# Altium PCB USBASP PCB.PcbDoc
Units mm, origin at the board's own origin, x right, y up, seen from the top; angles counter-clockwise.
Board outline 41.91 x 63.37 mm, 2 copper layers (Top Layer, Bottom Layer); 24 components, 23 nets, 89 pads, 20 vias.
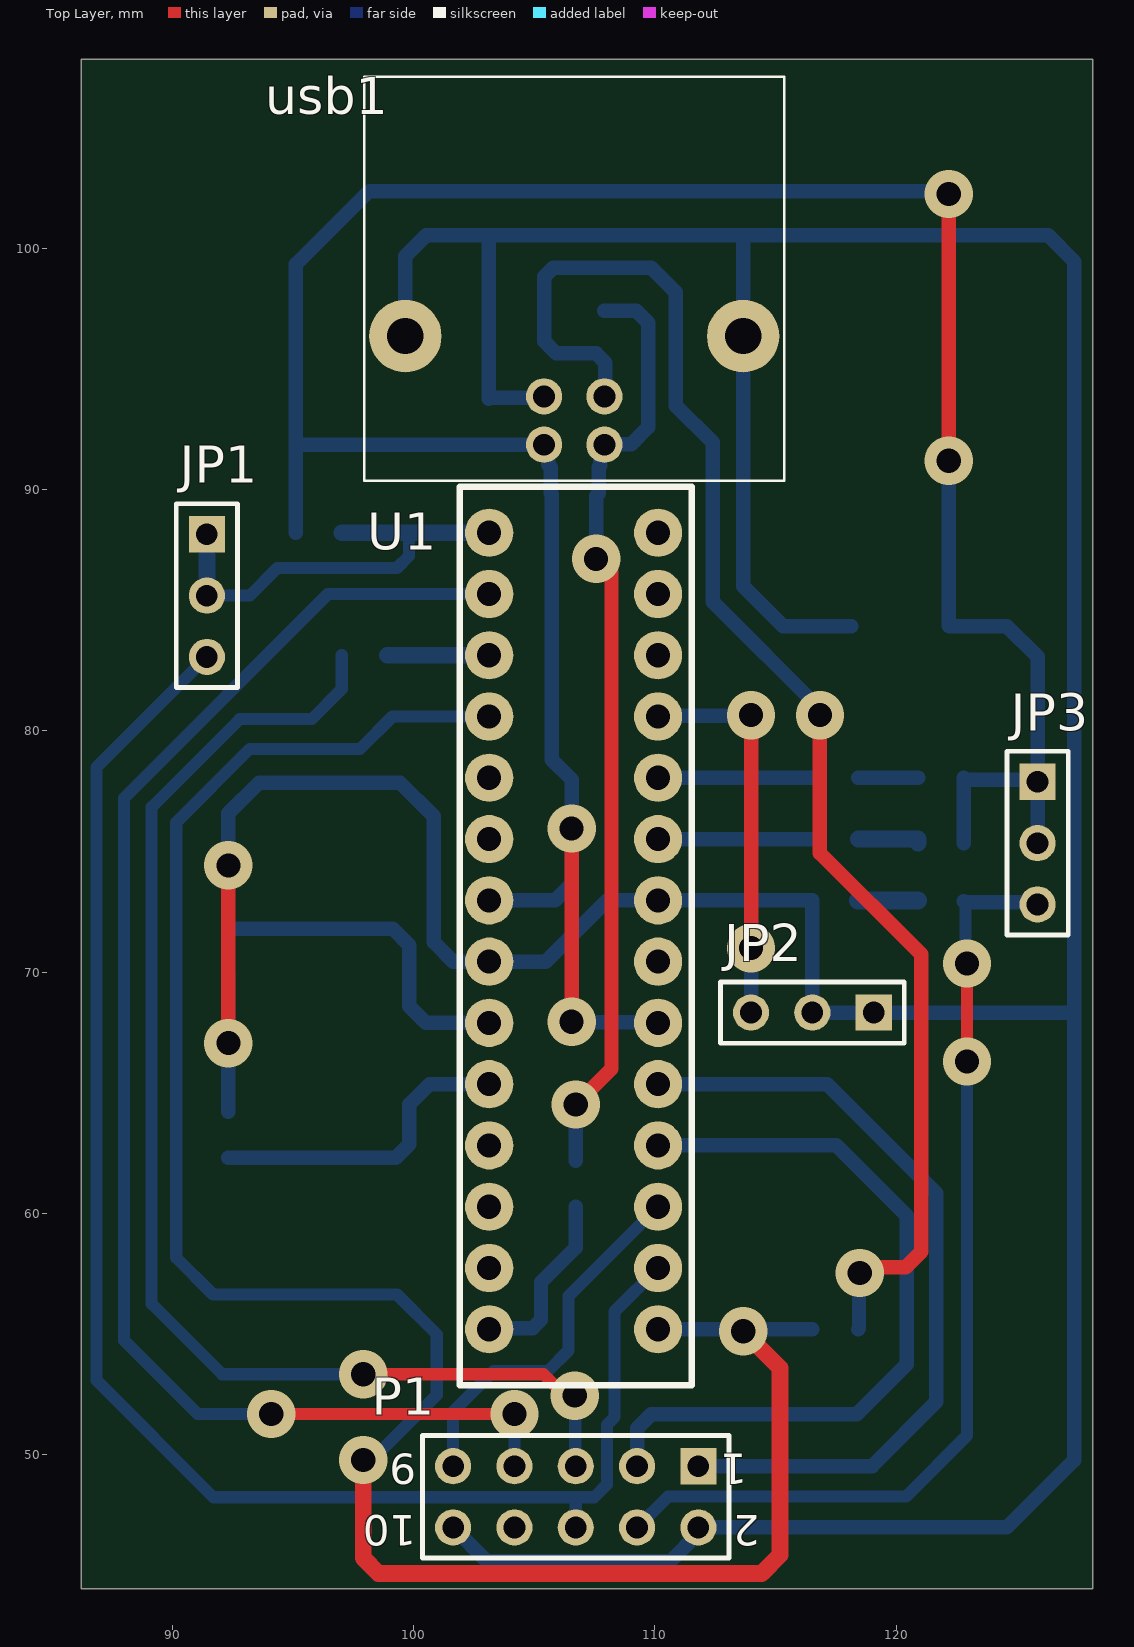
[diagram p0: Top Layer view]
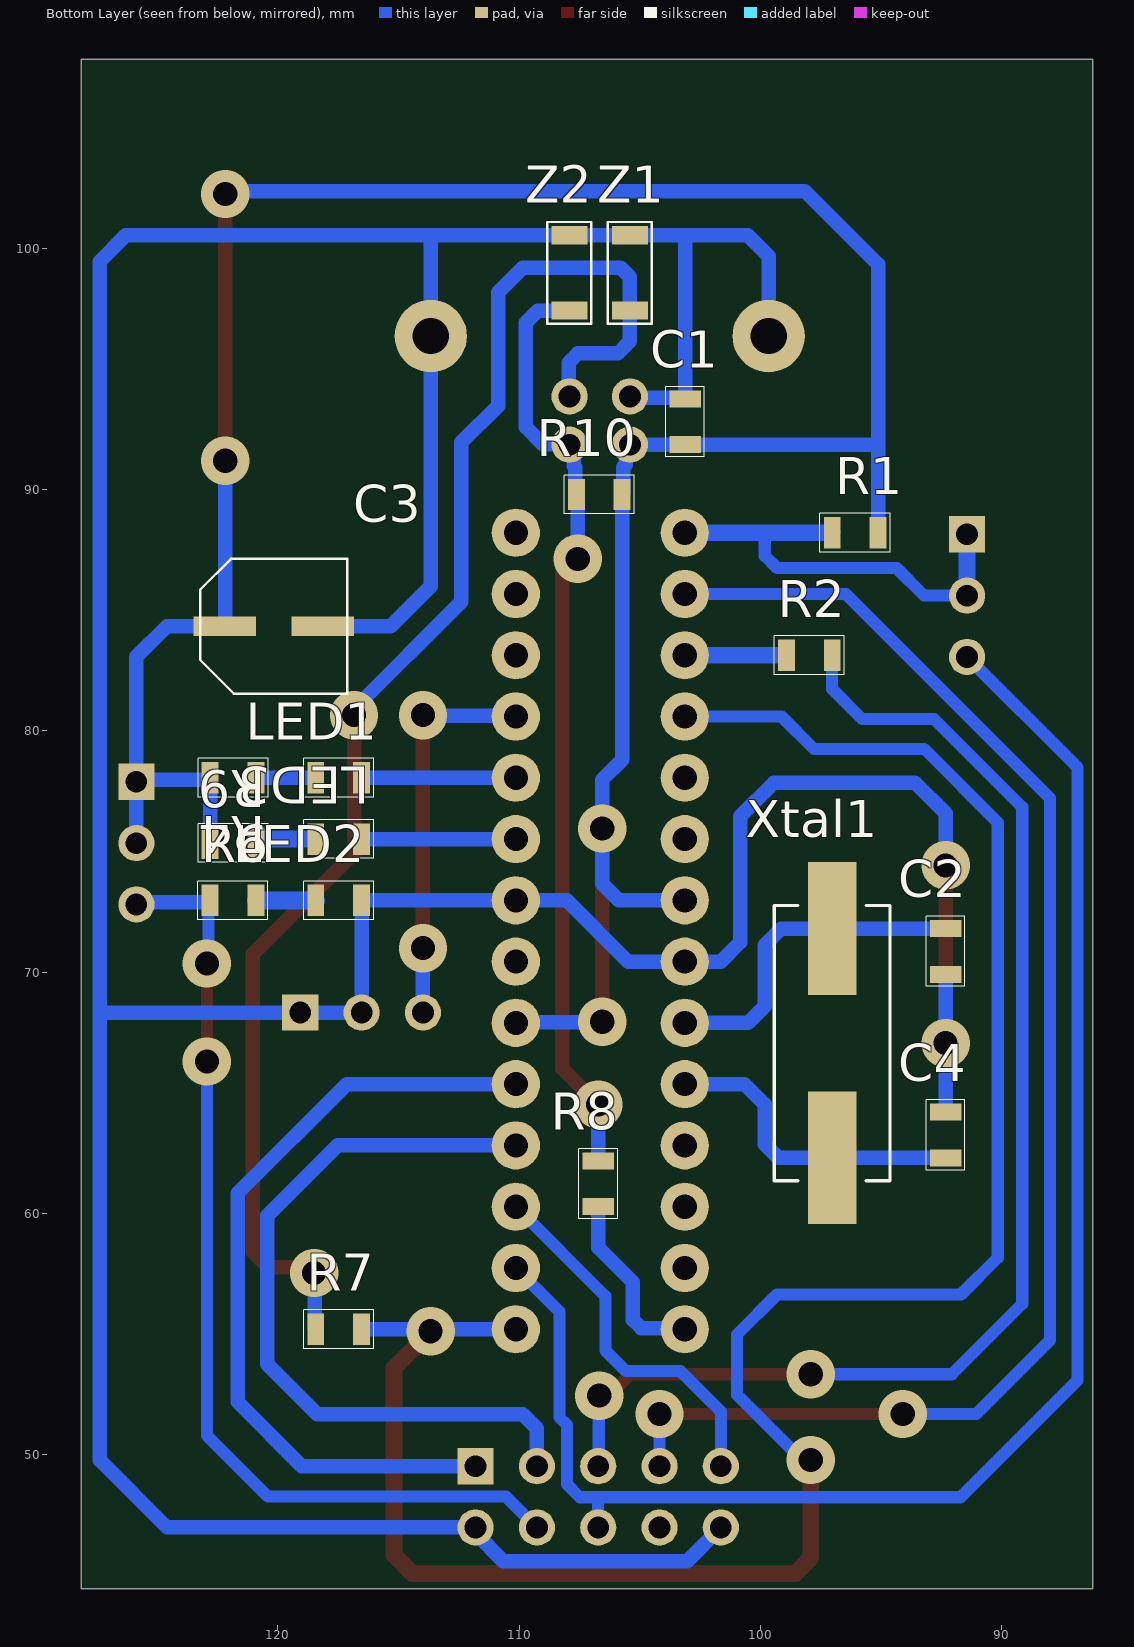
[diagram p1: Bottom Layer view, seen from below]
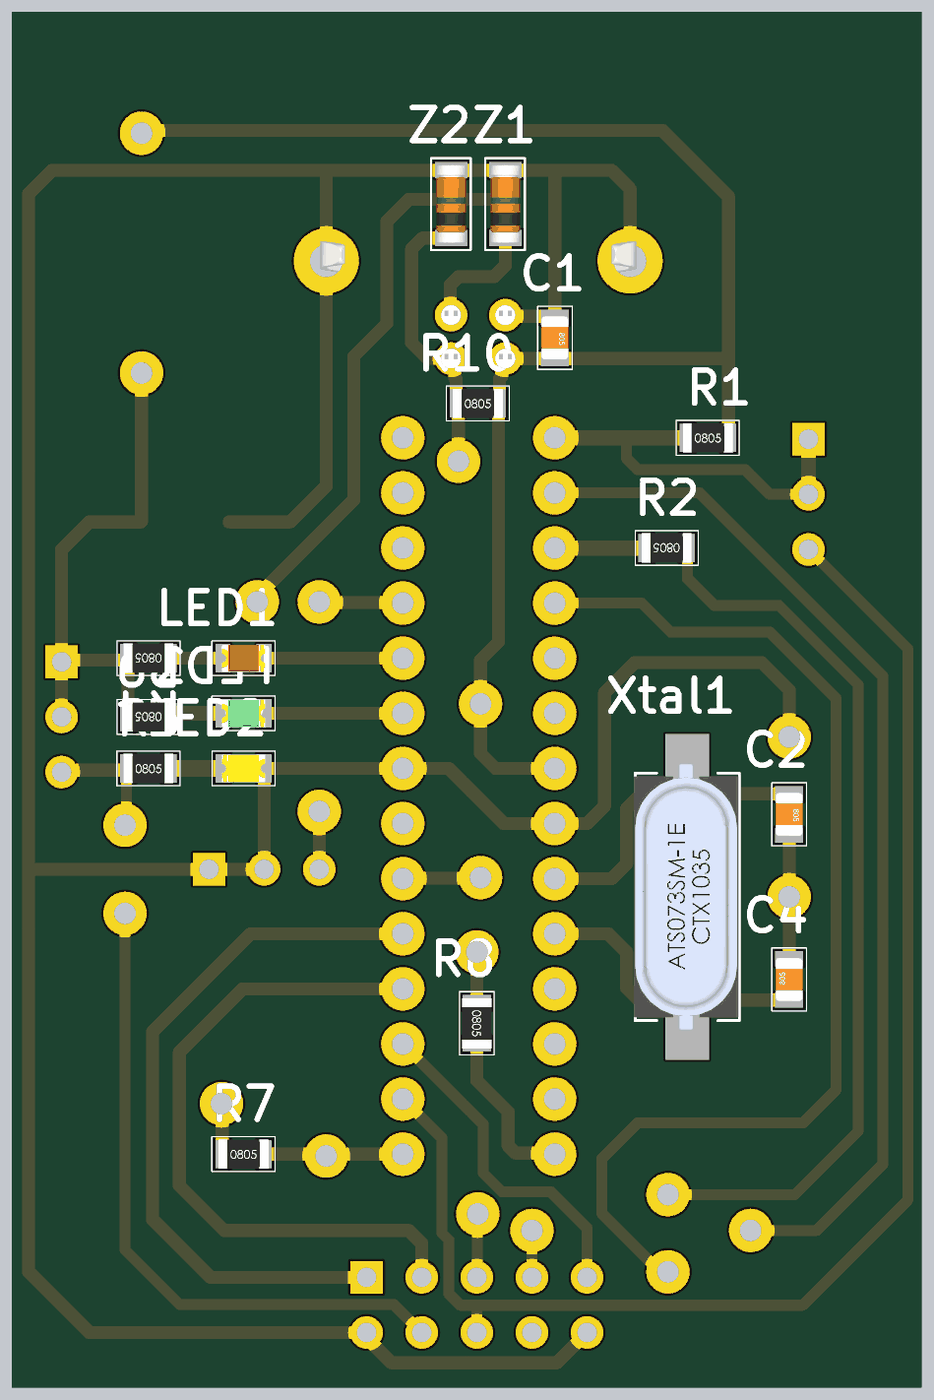
[diagram p2: 3D render of the assembled board from below, using the file's embedded part models]

## Layer stack, top to bottom
Top Solder: solder mask 0.0102, Solder Resist, Dk 3.5
Top Layer: signal copper 0.0356
Dielectric 1: dielectric 0.32, FR-4, Dk 4.8
Bottom Layer: signal copper 0.0356
Bottom Solder: solder mask 0.0102, Solder Resist, Dk 3.5

## Board outline
86.233,44.45 86.233,107.823 128.143,107.823 128.143,44.45

## Design rules (kind name [scope] priority, off if disabled: settings)
Clearance [All] p1: gap=0.254 ignorepadtopadclearanceinfootprint=FALSE except(0: Arc-Hole Track-Hole SMDPad-Hole THPad-Hole Via-Hole Fill-Hole Poly-Hole Region-Hole Text-Hole)
PolygonConnect [All] p1: connectstyle=Relief reliefconductorwidth=0.254 reliefentries=4 polygonreliefangle="90 Angle" airgapwidth=0.254
RoutingVias [All] p1: holewidth=1 width=2 viastyle="Through Hole" minholewidth=1 minwidth=2 maxholewidth=1 maxwidth=2
SolderMaskExpansion [All] p1: expansion=0.102 istentingtop=FALSE
Width [All] p1: maxlimit=1 minlimit=0.254 preferedwidth=0.254
30 further rules are at their usual default settings.

## Components (designator, comment, footprint, x,y, rotation, side; value= is the part's Value field where it differs from the comment)
C1 "100nF" SMD_0805 103.124,92.803 r270 bottom
C2 "22pF" SMD_0805 92.329,70.856 r270 bottom
C3 "4u7F" "Core C (6.3X5.4)" 152.678,74.295 r90 bottom
C4 "22pF" SMD_0805 92.329,63.256 r90 bottom
JP1 "Header 3" HDR1X3 91.44,88.138 r270 top
JP2 "Header 3" HDR1X3 119.065,68.326 r180 top
JP3 "Header 3" HDR1X3 125.857,77.884 r270 top
LED1 "LED Red" "LED 0805 RED" 117.475,78 r180 bottom
LED2 "LED Yellow" "LED 0805 YELLOW" 117.475,72.973 r0 bottom
LED3 "LED Green" "LED 0805 GREEN" 117.475,75.462 r180 bottom
P1 "Header 5X2" HDR2X5 111.803,49.53 r180 top
R1 "10K0R" 0805 96.078,88.204 r180 bottom
R2 "270R" 0805 97.978,83.127 r0 bottom
R4 "220R" 0805 121.854,78.05 r0 bottom
R6 "220R" 0805 121.854,72.973 r180 bottom
R7 "68R" 0805 117.475,55.204 r180 bottom
R8 "68R" 0805 106.723,61.231 r270 bottom
R9 "220R" 0805 121.854,75.344 r0 bottom
R10 "2K2R" 0805 106.68,89.789 r180 bottom
U1 "ATmega8-16PC" "AT MEGA 8" 106.635,71.704 r0 top
usb1 "USB-A (SMD)" "USB-A (SMD)" 106.66,94.103 r0 top
Xtal1 "Xtal SMD" Xtal 97.028,67.056 r90 bottom
Z1 "3V6 Zener" "Zener _ mini melf" 105.46,98.679 r90 bottom
Z2 "3V6 Zener" "Zener _ mini melf" 107.96,98.679 r90 bottom

## Footprints (in the part's own frame and the unit in brackets; to place one, negate y for a bottom-side part, rotate by r counter-clockwise, add the part's x,y. Pads: shape width x height; smd on the part's side, far side on the other; paste and mask are expansions set on the pad)
0805 [mm]
  rect 0.7x1.3 smd: 1(-0.95,0) 2(0.95,0)
  silkscreen extent -1.46,-0.8 1.45,0.8, body extent -1.15,-0.67 1.15,0.68, height 0.76
"AT MEGA 8" [mm]
  round 2 hole 1: 1(-3.5,16.5) 2(-3.5,13.962) 3(-3.5,11.423) 4(-3.5,8.885) 5(-3.5,6.346) 6(-3.5,3.808) 7(-3.5,1.269) 8(-3.5,-1.269) 9(-3.5,-3.808) 10(-3.5,-6.346) 11(-3.5,-8.885) 12(-3.5,-11.423) 13(-3.5,-13.962) 14(-3.5,-16.5) 15(3.5,-16.5) 16(3.5,-13.962) 17(3.5,-11.423) 18(3.5,-8.885) 19(3.5,-6.346) 20(3.5,-3.808) 21(3.5,-1.269) 22(3.5,1.269) 23(3.5,3.808) 24(3.5,6.346) 25(3.5,8.885) 26(3.5,11.423) 27(3.5,13.962) 28(3.5,16.5)
  silkscreen extent -4.72,-18.82 4.9,18.41
"Core C (6.3X5.4)" [mm]
  rect 0.8x2.6 smd: +(10.033,-30.48) -(10.033,-34.544)
  silkscreen extent 7.24,-35.56 12.83,-29.46, body extent 7.38,-35.46 12.68,-29.56, height 5.41
HDR1X3 [mm] "Connector; Header; 3 Position"
  rect 1.5x1.5 hole 0.9: 1(0,0)
  round 1.5 hole 0.9: 2(2.54,0) 3(5.08,0)
  silkscreen extent -1.27,-1.27 6.35,1.27
HDR2X5 [mm] "Connector; Header; 5x2 Position"
  rect 1.5x1.5 hole 0.9: 1(0,0)
  round 1.5 hole 0.9: 2(0,2.54) 3(2.54,0) 4(2.54,2.54) 5(5.08,0) 6(5.08,2.54) 7(7.62,0) 8(7.62,2.54) 9(10.16,0) 10(10.16,2.54)
  silkscreen extent -1.27,-1.27 11.43,3.81
"LED 0805 GREEN" [mm]
  rect 0.7x1.3 smd: 1(-0.95,0.05) 2(0.95,0.05)
  silkscreen extent -1.46,-0.75 1.45,0.85, body extent -1,-0.57 1,0.68, height 1.12
"LED 0805 RED" [mm]
  rect 0.7x1.3 smd: 1(-0.95,0.05) 2(0.95,0.05)
  silkscreen extent -1.46,-0.75 1.45,0.85, body extent -1,-0.57 1,0.68, height 1.11
"LED 0805 YELLOW" [mm]
  rect 0.7x1.3 smd: 1(-0.95,0) 2(0.95,0)
  silkscreen extent -1.46,-0.8 1.45,0.8, body extent -1,-0.62 1,0.63, height 1.11
SMD_0805 [mm]
  rect 0.7x1.3 smd: 1(-0.95,0) 2(0.95,0)
  Top Layer pour cut-out: -0.508,0.762 0.508,0.762 0.508,-0.762 -0.508,-0.762
  silkscreen extent -1.46,-0.8 1.45,0.8, body extent -1,-0.62 1,0.63, height 0.78
"USB-A (SMD)" [mm]
  round 1.5 hole 0.9: 1(-1.25,-2.25) 2(1.25,-2.25) 3(1.25,-0.25) 4(-1.25,-0.25)
  round 3 hole 1.5: S1(-7,2.25) S2(7,2.25)
  silkscreen extent -8.7,-3.75 8.7,13, body extent -7.3,-3.65 7.3,12.85, height 12.53
Xtal [mm]
  rect 5.5x2 smd: 1(-4.75,0) 2(4.75,0)
  silkscreen extent -5.7,-2.4 5.7,2.4, body extent -6.15,-2.36 6.15,2.47, height 4.31
"Zener _ mini melf" [mm]
  rect 0.75x1.5 smd: 1(1.85,-0.05) 2(-1.275,-0.05)
  silkscreen extent -1.83,-0.95 2.4,0.87, body extent -1.5,-0.8 2.1,0.7, height 1.5

## Part data
C1 C2 C4: library part "SMD CAP"
C3: library part "Electrolit CAP"
JP1 JP2 JP3: "Header, 3-Pin", Publisher="Altium Limited", Revision="17-Jul-2002: Re-released for DXP Platform."
P1: "Header, 5-Pin, Dual row", LatestRevisionDate=17-Jul-2002, LatestRevisionNote="Re-released for DXP Platform.", Publisher="Altium Limited"
R1 R2 R4 R6 R7 R8 R9 R10: library part SMD
U1: "8-Bit AVR Microcontroller with 8K Bytes of In-System Programmable Flash Memory", Package Information="Latest Revision: revB, Sep-2001", Package Reference=28P3, Datasheet="Latest Revision: 2486H-AVR-09/02", Published=17-Sep-2003, Publisher="Altium Limited"
Xtal1: library part Xtal
Z1 Z2: library part Zener

## Via types
v1: diameter 2, hole 1, Top Layer to Bottom Layer, 20 vias

## Nets (pads, with @x,y where several pads share a name; then routed paths per layer and width w, separated by ;. In a path a pad name is that pad's centre, name@x,y a point inside that pad or via, vN(x,y) a via of type N, cw(c..) or ccw(c..) an arc to the next point about the centre after c; other vN are vias at no path point)
GND: C1.1 C2.2 C3.- C4.2 JP2.1 JP2.2 LED2.1 P1.2 P1.10 U1.8 U1.22 usb1.4 usb1.S1 usb1.S2 Z1.1 Z2.1 | length 201.1
  Top Layer w0.6: v1(92.329,67.056) v1(92.329,74.422)
  Bottom Layer w0.6: C4.2 v1(92.329,67.056) C2.2 ; v1(92.329,74.422) 92.329,76.581 93.599,77.851 99.441,77.851 100.838,76.454 100.838,71.247 101.65,70.435 U1.8 105.487,70.435 108.025,72.973 U1.22 LED2.1 JP2.2 127.381,68.326 ; usb1.S1 99.66,99.66 100.529,100.529 103.124,100.529 ; P1.10 103.04,45.593 110.649,45.593 111.803,46.746 P1.2 124.587,46.99 127.381,49.784 127.381,68.326 ; usb1.4 105.36,93.803 103.174,93.803 C1.1 103.124,100.529 ; C3.- 115.316,84.328 113.66,85.984 usb1.S2 113.66,100.529 ; 103.124,100.529 Z1.1 Z2.1 113.66,100.529 ; 113.66,100.529 126.293,100.529 127.381,99.441 127.381,68.326
MISO: P1.3 U1.18 | length 31.5
  Bottom Layer w0.6: P1.3 109.263,51.097 109.855,51.689 118.364,51.689 120.431,53.756 120.431,59.909 117.52,62.82 U1.18
MOSI: P1.9 U1.17 | length 15.6
  Bottom Layer w0.5: P1.9 101.643,51.794 103.316,53.467 105.569,53.467 106.426,54.324 106.426,56.573 U1.17@110.108,60.255
NetJP1_1: JP1.1 JP1.2 R1.1 U1.1 | length 18.8
  Bottom Layer w0.5: JP1.2 93.218,85.598 94.361,86.741 99.314,86.741 99.822,87.249 99.822,88.204
  Bottom Layer w0.7: JP1.2 JP1.1 JP1.1@91.44,88.252 ; R1.1 99.822,88.204 U1.1
NetJP2_3: JP2.3 U1.25 | length 16.2
  Top Layer w0.6: v1(113.985,70.993) v1(113.985,80.645)
  Bottom Layer w0.6: U1.25 110.163,80.617 113.957,80.617 v1(113.985,80.645) ; JP2.3 v1(113.985,70.993)
NetJP3_3: JP3.3 P1.4 R6.1 | length 40.6
  Top Layer w0.5: v1(122.936,66.294) v1(122.936,70.358)
  Bottom Layer w0.5: P1.4 110.549,48.276 120.412,48.276 122.936,50.8 v1(122.936,66.294) ; R6.1 122.806,72.971 122.806,72.936 122.87,72.873 122.87,70.424 v1(122.936,70.358)
  Bottom Layer w0.6: R6.1@122.806,72.936 122.854,72.889 125.772,72.889 JP3.3
NetLED1_1: LED1.1 R4.1 | length 2.5
  Bottom Layer w0.6: LED1.1 R4.1
NetLED1_2: LED1.2 U1.24 | length 6.4
  Bottom Layer w0.6: U1.24 LED1.2
NetLED2_2: LED2.2 R6.2 | length 2.5
  Bottom Layer w0.75: LED2.2 R6.2
NetLED3_1: LED3.1 R9.1 | length 2.6
  Bottom Layer w0.7: LED3.1 120.904,75.512 R9.1
NetLED3_2: LED3.2 U1.23 | length 6.4
  Bottom Layer w0.6: U1.23 LED3.2
NetR2_2: R2.2 U1.3 | length 4.2
  Bottom Layer w0.7: R2.2 U1.3
NetR7_1: R7.1 usb1.3 Z1.2 | length 62.3
  Top Layer w0.6: v1(116.84,80.645) 116.84,74.93 121.031,70.739 121.031,58.42 120.391,57.78 118.74,57.78 v1(118.491,57.531)
  Bottom Layer w0.6: usb1.3 107.95,93.893 107.95,95.25 107.569,95.631 105.918,95.631 105.41,96.139 Z1.2 105.41,98.806 105.791,99.187 109.855,99.187 110.871,98.171 110.871,93.472 112.395,91.948 112.395,85.344 116.84,80.899 v1(116.84,80.645) ; R7.1 118.458,55.237 118.458,57.498 v1(118.491,57.531)
NetR7_2: R7.2 U1.4 U1.15 | length 89.8
  Top Layer w0.7: v1(97.917,49.784) 97.917,45.72 98.552,45.085 114.427,45.085 115.189,45.847 115.189,53.594 v1(113.665,55.118)
  Bottom Layer w0.5: v1(97.917,49.784) 98.269,49.784 100.965,52.48 100.965,54.991 99.314,56.642 91.694,56.642 90.17,58.166 90.17,76.2 93.218,79.248 97.79,79.248 99.131,80.589 U1.4
  Bottom Layer w0.6: U1.15 R7.2
NetR8_1: R8.1 R10.1 usb1.2 Z2.2 | length 39.2
  Top Layer w0.6: v1(106.723,64.516) 108.204,65.997 108.204,86.614 107.696,87.122 v1(107.569,87.122)
  Bottom Layer w0.6: R8.1 v1(106.723,64.516) ; v1(107.569,87.122) 107.569,89.022 107.58,89.033 107.58,89.739 R10.1 107.68,89.839 107.68,90.916 107.738,90.974 107.738,91.681 usb1.2 107.933,91.876 109.021,91.876 109.728,92.583 109.728,96.901 109.225,97.404 Z2.2
NetR8_2: R8.2 U1.14 | length 7.6
  Bottom Layer w0.6: U1.14 103.181,55.251 104.932,55.251 105.283,55.602 105.283,57.15 106.723,58.59 R8.2
RST: JP1.3 P1.6 U1.16 | length 66.3
  Bottom Layer w0.5: JP1.3 86.868,78.486 86.868,53.086 91.71,48.244 106.723,48.244 ; P1.6 106.723,48.244 ; U1.16 108.331,55.939 108.331,51.562 108.009,51.24 108.009,48.768 107.485,48.244 106.723,48.244
RX: P1.7 U1.2 | length 60.7
  Top Layer w0.5: v1(94.107,51.689) v1(104.183,51.689)
  Bottom Layer w0.5: v1(94.107,51.689) 91.059,51.689 88.011,54.737 88.011,77.216 96.461,85.666 U1.2 ; P1.7 v1(104.183,51.689)
SCK: P1.1 U1.19 | length 33
  Bottom Layer w0.6: U1.19 117.141,65.358 121.666,60.833 121.666,52.197 118.999,49.53 P1.1
TX: P1.5 R2.1 | length 53.9
  Top Layer w0.5: v1(97.917,53.34) 105.385,53.34 106.274,52.451 v1(106.68,52.451) ; P1.5@106.701,49.551 P1.5
  Bottom Layer w0.5: R2.1 97.028,81.727 95.784,80.483 92.802,80.483 89.154,76.835 89.154,56.261 92.075,53.34 v1(97.917,53.34) ; P1.5@106.701,49.551 v1@106.701,52.43
VCC: C1.2 C3.+ JP3.1 JP3.2 R1.2 R4.2 R9.2 R10.2 U1.7 U1.20 usb1.1 | length 119.4
  Top Layer w0.6: v1(106.553,67.945) v1(106.553,75.946) ; v1(122.174,91.186) v1(122.174,102.235)
  Bottom Layer w0.6: R1.2 95.128,91.853 ; U1.7 105.866,72.973 106.553,73.66 v1(106.553,75.946) 106.553,77.978 105.73,78.801 R10.2 105.68,89.839 105.68,90.916 105.582,91.014 105.582,91.681 usb1.1 C1.2 95.128,91.853 ; v1(106.553,67.945) 106.577,67.921 110.11,67.921 U1.20 ; v1(122.174,91.186) 122.174,84.352 C3.+ 124.587,84.328 125.857,83.058 JP3.1 ; v1(122.174,102.235) 122.047,102.362 98.171,102.362 95.128,99.319 95.128,91.853 ; R9.2 R4.2@122.804,78.017 ; R4.2 R4.2@122.804,78.017 ; JP3.2 JP3.1 ; R4.2@122.804,78.017 122.854,77.967 125.774,77.967 JP3.1
X1: C2.1 U1.9 Xtal1.2 | length 13.9
  Bottom Layer w0.6: C2.1 Xtal1.2 99.136,71.806 99.822,71.12 99.822,68.58 100.505,67.897 U1.9
X2: C4.1 U1.10 Xtal1.1 | length 13
  Bottom Layer w0.6: C4.1 Xtal1.1 99.263,62.306 99.822,62.865 99.822,64.516 100.664,65.358 U1.10
pads on no net: P1.8 U1.5 U1.6 U1.11 U1.12 U1.13 U1.21 U1.26 U1.27 U1.28

## Silkscreen, mask and mechanical layers (free items; w line width, h text height)
Mechanical 1:
  the board outline again, w0.3

## Text inside footprints (layer, text, board x,y; h text height)
P1: Top Overlay "10" at 100.119,47.498 h1.27 r180; Top Overlay "9" at 100.119,50.038 h1.27 r180; Top Overlay "1" at 113.835,50.038 h1.27 r180; Top Overlay "2" at 114.343,47.498 h1.27 r180